# Altium PCB main_pcb.PcbDoc
Units mm, origin at the board's own origin, x right, y up, seen from the top; angles counter-clockwise.
Board outline 150 x 60 mm, 2 copper layers (Top Layer, Bottom Layer); 40 components, 27 nets, 152 pads, 0 vias.
Unrouted connection lines stored in the file: 1.
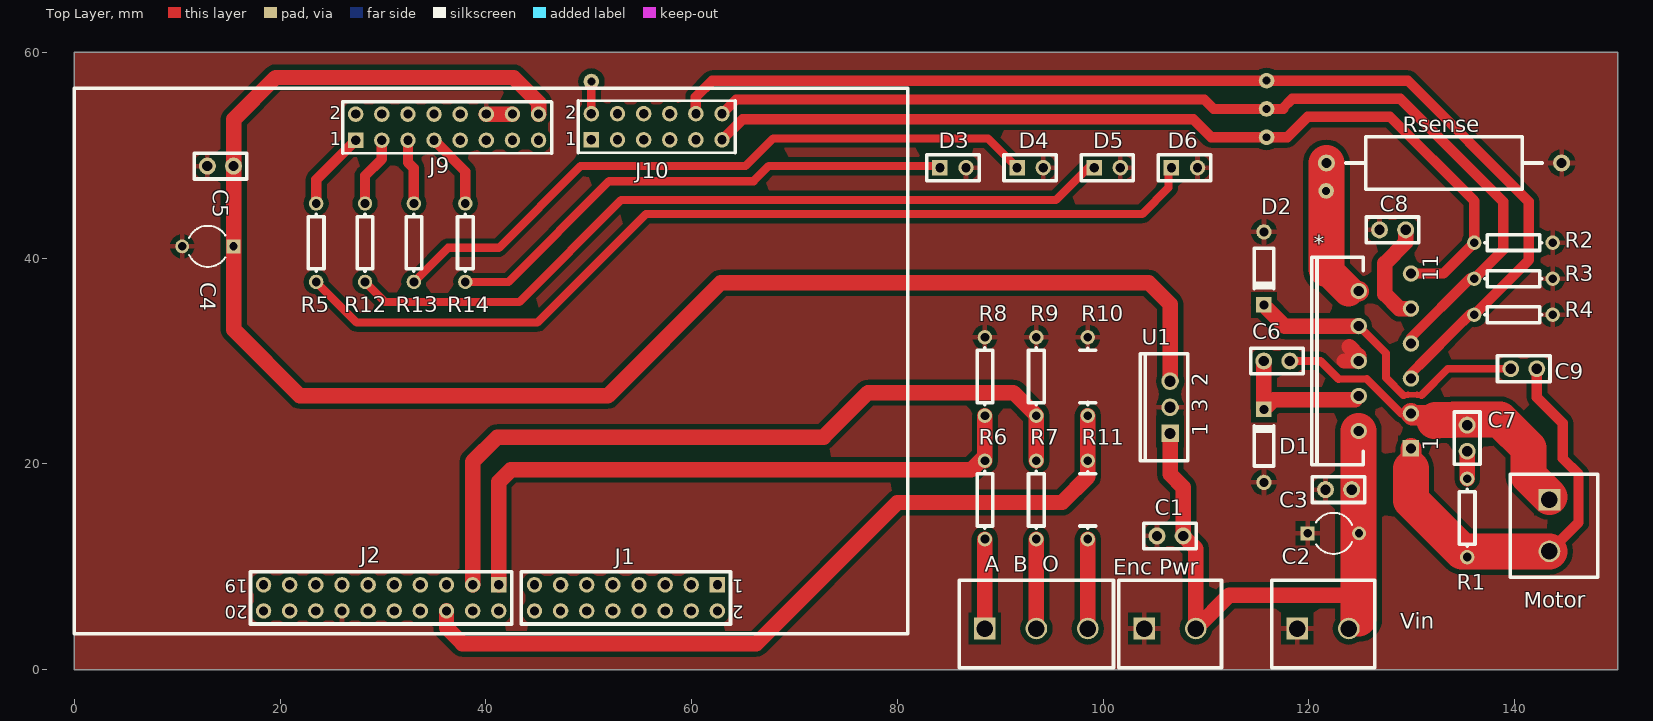
[diagram p0: Top Layer view]
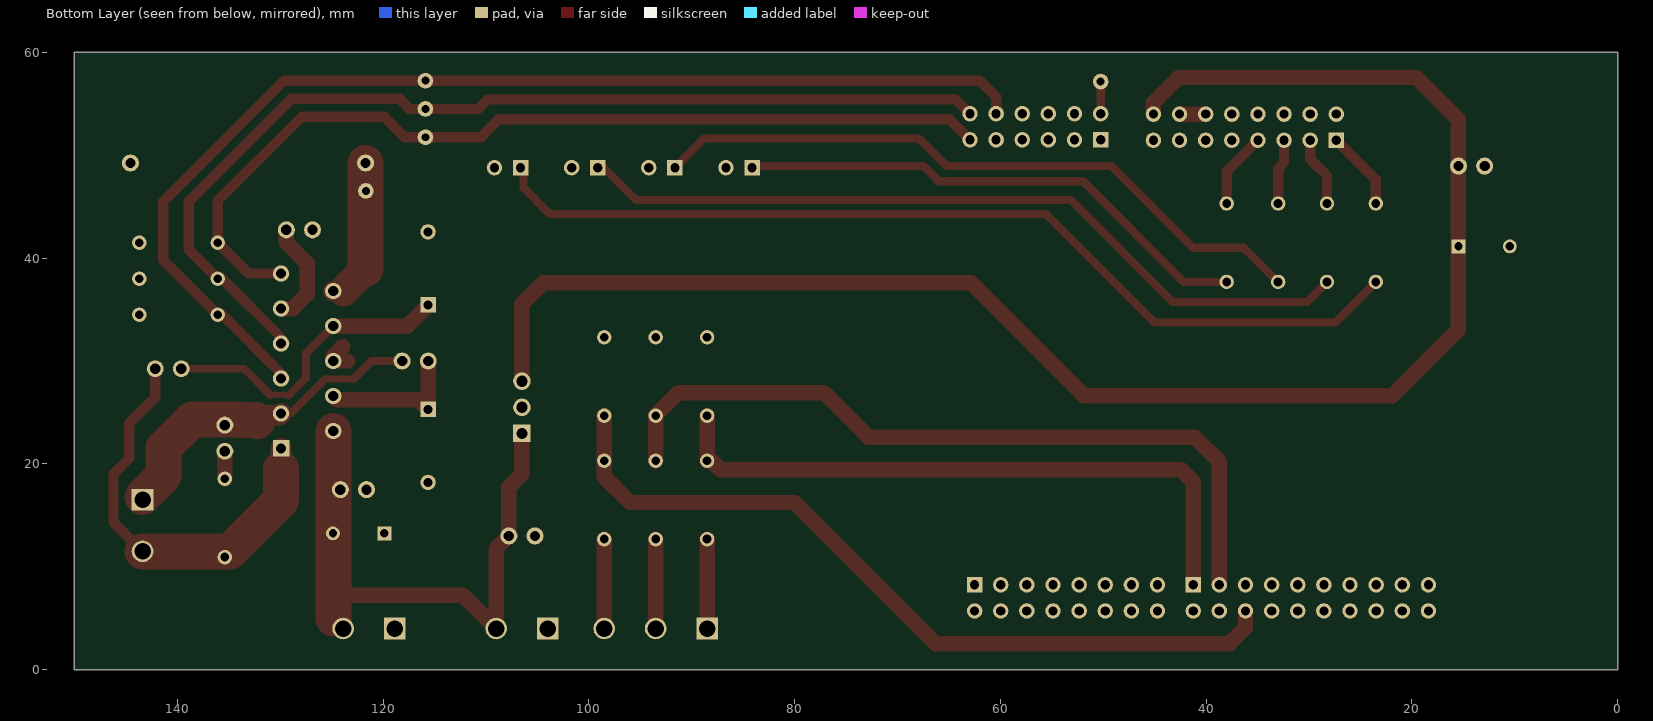
[diagram p1: Bottom Layer view, seen from below]

## Layer stack, top to bottom
Top Solder: solder mask 0.0102, Solder Resist, Dk 3.5
Top Layer: signal copper 0.0356
Dielectric 1: dielectric 0.32, FR-4, Dk 4.8
Bottom Layer: signal copper 0.0356
Bottom Solder: solder mask 0.0102, Solder Resist, Dk 3.5

## Board outline
0,0 150,0 150,60 0,60

## Design rules (kind name [scope] priority, off if disabled: settings)
Clearance [All] p1: gap=0.5
PolygonConnect [All] p1: connectstyle=Relief reliefconductorwidth=0.5 reliefentries=4 polygonreliefangle="90 Angle" airgapwidth=0.5
RoutingVias [All] p1: holewidth=0.711 width=1.27 viastyle="Through Hole" minholewidth=0.711 minwidth=1.27 maxholewidth=0.711 maxwidth=1.27
SolderMaskExpansion [All] p1: expansion=0.2
Width [All] p1: maxlimit=4 minlimit=0.254 preferedwidth=0.254
30 further rules are at their usual default settings.

## Components (designator, comment, footprint, x,y, rotation, side; value= is the part's Value field where it differs from the comment)
* "L6203" Multiwatt11V 127.374,30 r90 top
"A  B  O" "691311700003" 691311700003 93.5,4 r0 top (schematic designator J4)
C1 "Cap" CAPR2.54-5.1x2.5 106.5,13 r0 top
C2 "Cap" CAPR5-4X5 122.374,13.25 r0 top
C3 "Cap" CAPR2.54-5.1x2.5 122.874,17.5 r180 top
C4 "Cap" CAPR5-4X5 12.979,41.148 r180 top
C5 "Cap" CAPR2.54-5.1x2.5 14.199,48.946 r0 top
C6 "Cap" CAPR2.54-5.1x2.5 116.874,30 r180 top
C7 "Cap" CAPR2.54-5.1x2.5 135.374,22.5 r90 top
C8 "Cap" CAPR2.54-5.1x2.5 128.124,42.75 r180 top
C9 "Cap" CAPR2.54-5.1x2.5 140.874,29.25 r0 top
D1 "Diode 1N914" DO-35 115.624,21.75 r90 top
D2 "Diode 1N914" DO-35 115.624,39 r270 top
D3 "LED3" HDR1X2 84.129,48.795 r0 top
D4 "LED2" HDR1X2 91.629,48.795 r0 top
D5 "LED1" HDR1X2 99.129,48.795 r0 top
D6 "LED0" HDR1X2 106.629,48.795 r0 top
"Enc Pwr" "691311700002" 691311700002 106.5,4 r0 top (schematic designator J1)
J1 "Header 8X2" HDR2X8 62.5,8.25 r180 top
J2 "Header 10X2" HDR2X10 41.25,8.25 r180 top
J9 "Header 8X2" HDR2X8 27.34,51.46 r0 top
J10 "Header 6X2" HDR2X6 50.25,51.5 r0 top
Motor "691311700002" 691311700002 143.374,14 r270 top (schematic designator J3)
R1 "Res3" AXIAL-0.3 135.374,14.75 r90 top
R2 "Res3" AXIAL-0.3 139.874,41.5 r180 top
R3 "Res3" AXIAL-0.3 139.874,38 r180 top
R4 "Res3" AXIAL-0.3 139.874,34.5 r180 top
R5 "Res3" AXIAL-0.3 23.5,41.5 r90 top
R6 "Res3" AXIAL-0.3 88.5,16.5 r90 top
R7 "Res3" AXIAL-0.3 93.5,16.5 r90 top
R8 "Res3" AXIAL-0.3 88.5,28.5 r270 top
R9 "Res3" AXIAL-0.3 93.5,28.5 r270 top
R10 "Res3" AXIAL-0.3 98.5,28.5 r270 top
R11 "Res3" AXIAL-0.3 98.5,16.5 r90 top
R12 "Res3" AXIAL-0.3 28.25,41.5 r90 top
R13 "Res3" AXIAL-0.3 33,41.5 r90 top
R14 "Res3" AXIAL-0.3 38,41.5 r90 top
Rsense "Res3" AXIAL-0.9 133.124,49.25 r180 top (schematic designator R5)
U1 "L7805CV" TO220ABN 106.5,25.5 r90 top
Vin "691311700002" 691311700002 121.374,4 r0 top (schematic designator J2)

## Footprints (in the part's own frame and the unit in brackets; to place one, negate y for a bottom-side part, rotate by r counter-clockwise, add the part's x,y. Pads: shape width x height; smd on the part's side, far side on the other; paste and mask are expansions set on the pad)
691311700002 [mm] "5.00mm - Open Vertical PCB Header - 02p"
  rect 2.1x2.1 hole 1.6: 1(-2.5,0)
  round 2.1 hole 1.6: 2(2.5,0)
  silkscreen extent -5,-3.8 5,4.7, body extent -5,-3.8 5,4.7, height 12.01
691311700003 [mm] "5.00mm - Open Vertical PCB Header - 03p"
  rect 2.1x2.1 hole 1.6: 1(-5,0)
  round 2.1 hole 1.6: 2(0,0) 3(5,0)
  silkscreen extent -7.5,-3.8 7.5,4.7, body extent -7.5,-3.8 7.5,4.7, height 12.01
AXIAL-0.3 [mm] "Axial Device, Thru-Hole; 2 Leads; 0.3 in Pin Spacing"
  round 1.4 hole 0.85: 1(-3.81,0) 2(3.81,0)
  silkscreen extent -2.77,-0.76 2.77,0.76
AXIAL-0.9 [mm] "Axial Device, Thru-Hole; 2 Leads; 0.9 in Pin Spacing"
  round 1.65 hole 1: 1(-11.43,0) 2(11.43,0)
  silkscreen extent -9.53,-2.54 9.53,2.54
CAPR2.54-5.1x2.5 [mm] "Capacitor, Ceramic, Thru-Hole, Dipped Radial; Body 5.1 x 2.5 mm (WxT) Pin Spacing 2.54 mm (typ)"
  round 1.65 hole 1: 1(-1.27,0) 2(1.27,0)
  silkscreen extent -2.55,-1.25 2.55,1.25
CAPR5-4X5 [mm] "Capacitor; 2 Leads"
  rect 1.35x1.35 hole 0.8: 1(-2.5,0)
  round 1.35 hole 0.8: 2(2.5,0)
  silkscreen extent -1.69,-2 1.82,2
DO-35 [mm] "Diode, Axial; Body 3.8 x 1.9 mm (LxDia. max), Lead Dia. 0.53 mm (max)"
  round 1.5 hole 0.9: 1(-3.55,0)
  rect 1.5x1.5 hole 0.9: 2(3.55,0)
  silkscreen extent -1.95,-0.95 2.05,0.95
HDR1X2 [mm] "Connector; Header; 2 Position"
  rect 1.5x1.5 hole 0.9: 1(0,0)
  round 1.5 hole 0.9: 2(2.54,0)
  silkscreen extent -1.27,-1.27 3.81,1.27
HDR2X6 [mm] "Connector; Header; 6x2 Position"
  rect 1.5x1.5 hole 0.9: 1(0,0)
  round 1.5 hole 0.9: 2(0,2.54) 3(2.54,0) 4(2.54,2.54) 5(5.08,0) 6(5.08,2.54) 7(7.62,0) 8(7.62,2.54) 9(10.16,0) 10(10.16,2.54) 11(12.7,0) 12(12.7,2.54)
HDR2X8 [mm] "Connector; Header; 8x2 Position"
  rect 1.5x1.5 hole 0.9: 1(0,0)
  round 1.5 hole 0.9: 2(0,2.54) 3(2.54,0) 4(2.54,2.54) 5(5.08,0) 6(5.08,2.54) 7(7.62,0) 8(7.62,2.54) 9(10.16,0) 10(10.16,2.54) 11(12.7,0) 12(12.7,2.54) 13(15.24,0) 14(15.24,2.54) 15(17.78,0) 16(17.78,2.54)
  silkscreen extent -1.27,-1.27 19.05,3.81
HDR2X10 [mm] "Connector; Header; 10x2 Position"
  rect 1.5x1.5 hole 0.9: 1(0,0)
  round 1.5 hole 0.9: 2(0,2.54) 3(2.54,0) 4(2.54,2.54) 5(5.08,0) 6(5.08,2.54) 7(7.62,0) 8(7.62,2.54) 9(10.16,0) 10(10.16,2.54) 11(12.7,0) 12(12.7,2.54) 13(15.24,0) 14(15.24,2.54) 15(17.78,0) 16(17.78,2.54) 17(20.32,0) 18(20.32,2.54) 19(22.86,0) 20(22.86,2.54)
  silkscreen extent -1.27,-1.27 24.13,3.81
Multiwatt11V [mm] "TO, Thru-Hole, Vertical, Heatsink Mounted; 11 Bent Staggered Leads; Pitch 1.7 mm"
  rect 1.6x1.6 hole 1: 1(-8.5,-2.54)
  round 1.6 hole 1: 2(-6.8,2.54) 3(-5.1,-2.54) 4(-3.4,2.54) 5(-1.7,-2.54) 6(0,2.54) 7(1.7,-2.54) 8(3.4,2.54) 9(5.1,-2.54) 10(6.8,2.54) 11(8.5,-2.54)
  silkscreen extent -10.1,2.09 10.1,7.09
TO220ABN [mm] "TO, Thru-Hole, Vertical, Heatsink Mounted; 3 In-Line Leads; Pitch 2.54 mm; Pin sequence 1, 3, 2"
  rect 1.7x1.7 hole 1.1: 1(-2.54,0)
  round 1.7 hole 1.1: 2(2.54,0) 3(0,0)
  silkscreen extent -5.2,-1.7 5.2,2.9

## Part data
"A  B  O" "Enc Pwr" Motor Vin: "WR-TBL Terminal block - serie 3117 - 5.00mm"
C1 C2 C3 C4 C5 C6 C7 C8 C9: "Capacitor"
D1 D2: "High Conductance Fast Diode"
D3 D4 D5: library part LED0, "Typical INFRARED GaAs LED"
D6: "Typical INFRARED GaAs LED"
J1 J9: "Header, 8-Pin, Dual row"
J2: "Header, 10-Pin, Dual row"
J10: "Header, 6-Pin, Dual row"
R1 R2 R3 R4 R5 R6 R7 R8 R9 R10 R11 R12 R13 R14 Rsense: "Resistor"
U1: "Positive Voltage Regulator"

## Free pads (board coordinates)
  round 1.524 hole 0.762: 0(121.666,46.533) 1(50.25,57.167) 3(115.874,57.25) 4(115.874,54.5) 5(115.874,51.75)

## Nets (pads, with @x,y where several pads share a name; then routed paths per layer and width w, separated by ;. In a path a pad name is that pad's centre, name@x,y a point inside that pad or via, vN(x,y) a via of type N, cw(c..) or ccw(c..) an arc to the next point about the centre after c; other vN are vias at no path point)
GND: "Enc Pwr.1" *.6 C1.1 C2.1 C3.2 C4.2 C5.1 C8.2 D1.1 D2.1 D3.2 D4.2 D5.2 D6.2 J2.14 J9.12 J9.14 R2.1 R3.1 R4.1 R8.1 R9.1 R10.1 Rsense.1 U1.3 Vin.1 | length 5.7
  Top Layer w1.5: J9.12 J9.14 ; 123.422,30 *.6 124.834,30.492 123.927,31.4
Net*_1: *.1 C9.2 Motor.2 R1.1 | length 41.2
  Top Layer w1: C9.2 142.144,26.48 144.678,23.946 144.678,20.523 146.202,18.999 146.202,14.319 Motor.2@143.383,11.5
  Top Layer w2: 129.914,19.54 *.1
  Top Layer w3.5: 129.914,19.54 129.914,16.46 134.874,11.5 Motor.2 Motor.2@143.383,11.5
Net*_2: "Enc Pwr.2" *.2 C1.2 C2.2 C3.1 U1.1 Vin.2 | length 57.2
  Top Layer w1.5: U1.1 106.5,19 107.77,17.73 C1.2 109,11.77 109,4 112.25,7.25 125.273,7.25 ; Vin.2 124.834,4.96
  Top Layer w3.5: 124.834,4.96 *.2
Net*_3: *.3 C6.1 C7.2 Motor.1 | length 32.1
  Top Layer w0.7: 122.874,28.25 125.624,28.25
  Top Layer w0.75: C6.1 121.124,30 122.874,28.25 ; 125.624,28.25 128.974,24.9
  Top Layer w0.8: 128.974,24.9 *.3
  Top Layer w2: *.3 130.064,24.75 131.424,24.75 131.924,24.25
  Top Layer w3.5: 132.199,24.173 132.277,24.173 132.277,24.25 134.046,24.25 134.101,24.305 138.569,24.305 141.349,21.525 141.349,18.825 Motor.1@143.374,16.8
Net*_4: *.4 C6.2 D1.2 | length 14.5
  Top Layer w1.5: C6.2 115.624,29.98 D1.2 116.574,26.25 124.484,26.25 *.4
Net*_5: *.5 J10.10 pad.3 R4.2 | length 111.9
  Top Layer w1: J10.10 60.41,55.66 62,57.25 117.5,57.25 ; pad.3 129.624,57.25 141.374,45.5 141.374,39.81 R4.2 135.624,34.5 134.197,33.072 131.342,30.217 129.914,28.79 *.5
Net*_7: *.7 J10.12 pad.4 R3.2 | length 100.8
  Top Layer w1: J10.12 64.333,55.423 109.827,55.423 110.75,54.5 117.5,54.5 ; pad.4 117.374,54.5 118.374,55.5 128.874,55.5 138.874,45.5 138.874,40.81 R3.2 135.624,38 129.914,32.29 *.7
Net*_8: *.8 C9.1 D2.2 | length 30.1
  Top Layer w0.55: 129.639,26.716 130.507,26.716
  Top Layer w0.6: 129.18,26.666 129.639,26.716 ; 130.507,26.716 130.915,26.666
  Top Layer w0.75: *.8 127.484,30.75 127.484,28.361 129.18,26.666 ; 130.941,26.692 133.499,29.25 C9.1
  Top Layer w1.5: D2.2 115.624,35.4 117.624,33.4 *.8
Net*_9: *.9 C8.1 | length 10.2
  Top Layer w1.5: C8.1 129.394,41.52 127.374,39.5 127.374,36.5 128.774,35.1 *.9
Net*_10: *.10 J10.2 pad.0 pad.1 Rsense.2 | length 19.7
  Top Layer w0: 120.12,47.676 Rsense.2
  Top Layer w0.8: J10.2 pad.1
  Top Layer w2: 123.824,36.8 *.10
  Top Layer w3: 121.694,38.93 123.824,36.8
  Top Layer w3.5: 121.694,38.93 Rsense.2
Net*_11: *.11 J10.11 pad.5 R2.2 | length 92
  Top Layer w1: J10.11 64.95,53.5 108.75,53.5 110.5,51.75 117.5,51.75 ; pad.5 117.874,51.75 119.874,53.75 127.874,53.75 136.064,45.56 R2.2 133.064,38.5 *.11
"NetA  B  O_1": "A  B  O.1" R6.1 | length 8.7
  Top Layer w1.5: 88.5,4 R6.1
"NetA  B  O_2": "A  B  O.2" R7.1 | length 8.7
  Top Layer w1.5: 93.5,4 R7.1
"NetA  B  O_3": "A  B  O.3" R11.1 | length 8.7
  Top Layer w1.5: 98.5,4 R11.1
NetC4_1: C4.1 C5.2 J9.16 U1.2 | length 160.5
  Top Layer w1.5: J9.16 45.12,55.13 42.694,57.556 19.556,57.556 15.5,53.5 15.5,33.039 21.92,26.619 51.841,26.619 62.84,37.617 104.417,37.617 106.5,35.535 U1.2
NetC7_1: C7.1 R1.2 | length 2.7
  Top Layer w1.5: R1.2 C7.1
NetD3_1: D3.1 R14.1 | length 49.9
  Top Layer w0.8: R14.1 42.19,37.69 51.982,47.482 66.024,47.482 67.488,48.946 83.236,48.946
NetD4_1: D4.1 R13.1 | length 65.6
  Top Layer w0.8: R13.1 36.31,41 41.25,41 49.196,48.946 65.227,48.946 67.92,51.638 88.792,51.638 ; 88.792,51.632 D4.1
NetD5_1: D5.1 R12.1 | length 76.9
  Top Layer w0.8: R12.1 30.19,35.75 43.25,35.75 53.144,45.644 95.394,45.644 D5.1@98.85,49.1
NetD6_1: D6.1 R5.1 | length 92.2
  Top Layer w0.8: R5.1 27.44,33.75 45,33.75 55.548,44.298 103.798,44.298 106.35,46.85 D6.1@106.35,49.1
NetJ2_1: J2.1 R6.2 R8.2 | length 62.7
  Top Layer w1.5: J2.1 41.25,18.25 42.431,19.431 87.181,19.431 R6.2@88.5,20.75 ; R6.2 R6.2@88.5,20.75 ; R8.2 R6.2@88.5,20.75
NetJ2_3: J2.3 R7.2 R9.2 | length 74.8
  Top Layer w1.5: J2.3 38.71,20.21 41.106,22.606 72.822,22.606 77.14,26.924 91.266,26.924 R9.2 R7.2
NetJ2_6: J2.6 R10.2 R11.2 | length 77.3
  Top Layer w1.5: J2.6 36.17,4.08 37.71,2.54 66.29,2.54 80,16.25 96,16.25 98.5,18.75 R11.2 R10.2
NetJ9_1: J9.1 R5.2 | length 7.7
  Top Layer w1: R5.2 23.5,47.62 J9.1
NetJ9_3: J9.3 R12.2 | length 6.8
  Top Layer w1: R12.2 28.25,48 29.88,49.63 J9.3
NetJ9_5: J9.5 R13.2 | length 6.4
  Top Layer w1: J9.5 32.42,49.33 33,48.75 R13.2
NetJ9_7: J9.7 R14.2 | length 7.4
  Top Layer w1: J9.7 38,48.42 R14.2
pads on no net: J1.1 J1.2 J1.3 J1.4 J1.5 J1.6 J1.7 J1.8 J1.9 J1.10 J1.11 J1.12 J1.13 J1.14 J1.15 J1.16 J2.2 J2.4 J2.5 J2.7 J2.8 J2.9 J2.10 J2.11 J2.12 J2.13 J2.15 J2.16 J2.17 J2.18 J2.19 J2.20 J9.2 J9.4 J9.6 J9.8 J9.9 J9.10 J9.11 J9.13 J9.15 J10.1 J10.3 J10.4 J10.5 J10.6 J10.7 J10.8 J10.9

## Polygon pours and split planes (outlines as drawn)
GND on Top Layer "Top Layer-No Net" (solid, pour order 2): 0,60 0,0 150,0 150,60

## Silkscreen, mask and mechanical layers (free items; w line width, h text height)
Top Overlay:
  lines w0.254: 26.07,50.19 46.313,50.19 46.364,50.14 ; 48.98,50.23 64.22,50.23 ; 48.98,55.31 64.22,55.31
  lines w0.35: 26.07,50.19 26.07,55.19 26.09,55.21 46.09,55.21 46.34,55.21 46.39,55.16 46.39,50.19 ; 48.98,50.23 48.98,55.31 ; 64.22,50.23 64.22,55.31 ; 97.738,13.96 99.262,13.96 ; 97.738,19.04 99.262,19.04 98.71,19.04 ; 97.738,25.96 99.262,25.96 ; 97.738,31.04 99.262,31.04 ; 98.5,13.75 98.5,13.96 ; 98.5,19.04 98.5,19.25 ; 98.5,25.75 98.5,26 ; 98.5,31.04 98.5,31.25 ; 0,3.5 81,3.5 81,56.5 0,56.5 0,3.5

## Text inside footprints (layer, text, board x,y; h text height)
*: Top Overlay "1" at 132.589,21.27 h1.5 r90; Top Overlay "11" at 132.589,37.69 h1.5 r90
J1: Top Overlay "2" at 65.04,6.218 h1.27 r180; Top Overlay "1" at 65.04,8.758 h1.27 r180
J2: Top Overlay "20" at 16.866,6.218 h1.27 r180; Top Overlay "19" at 16.866,8.758 h1.27 r180
J9: Top Overlay "2" at 24.8,53.492 h1.27; Top Overlay "1" at 24.8,50.952 h1.27
J10: Top Overlay "1" at 47.71,50.992 h1.27; Top Overlay "2" at 47.71,53.532 h1.27
U1: Top Overlay "1" at 110.175,22.71 h1.5 r90; Top Overlay "2" at 110.175,27.54 h1.5 r90; Top Overlay "3" at 110.175,25 h1.5 r90